# Altium PCB CanGateLPC1768_rev1.PcbDoc
Units mm, origin at the board's own origin, x right, y up, seen from the top; angles counter-clockwise.
Board outline 99 x 36 mm, 2 copper layers (Top Layer, Bottom Layer), stack 1.571 mm thick; 48 components, 33 nets, 221 pads, 81 vias.
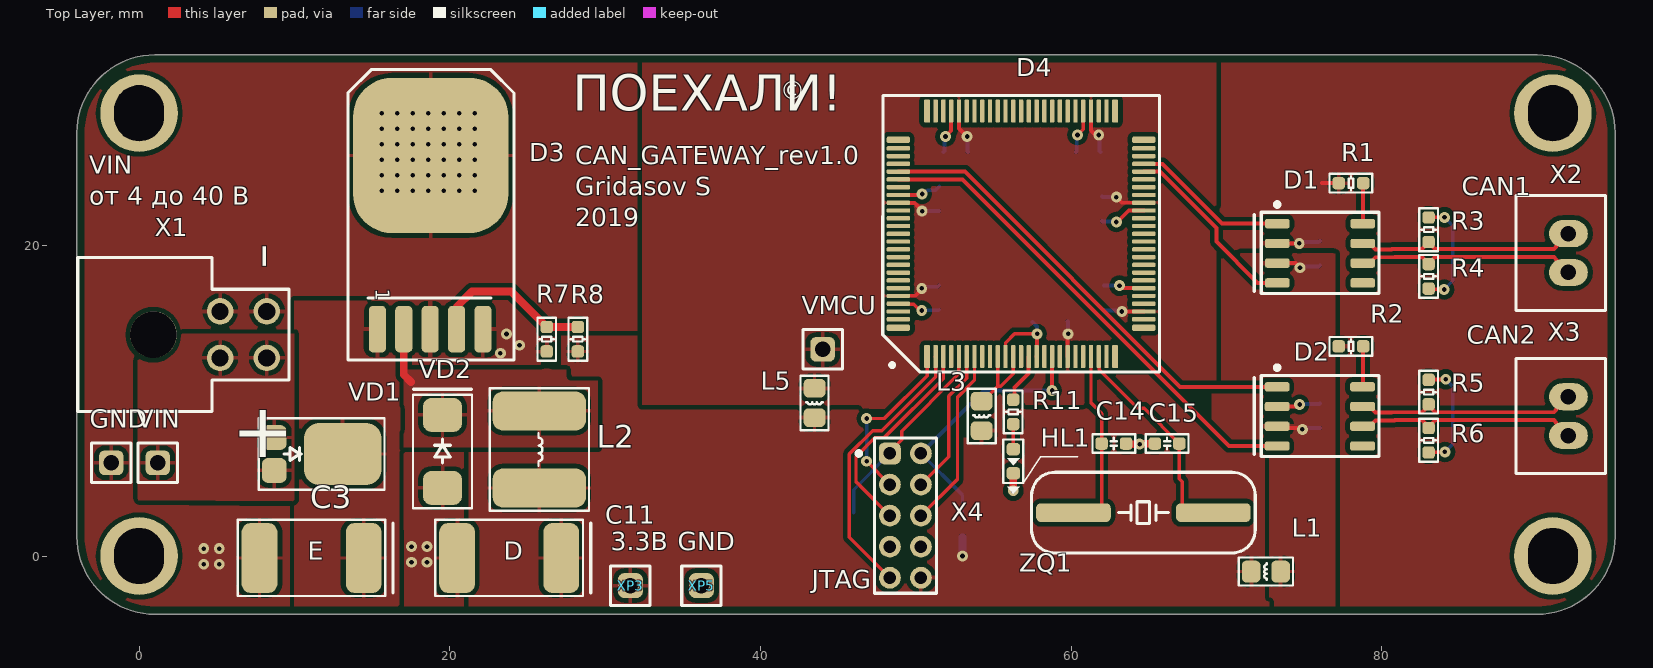
[diagram p0: Top Layer view]
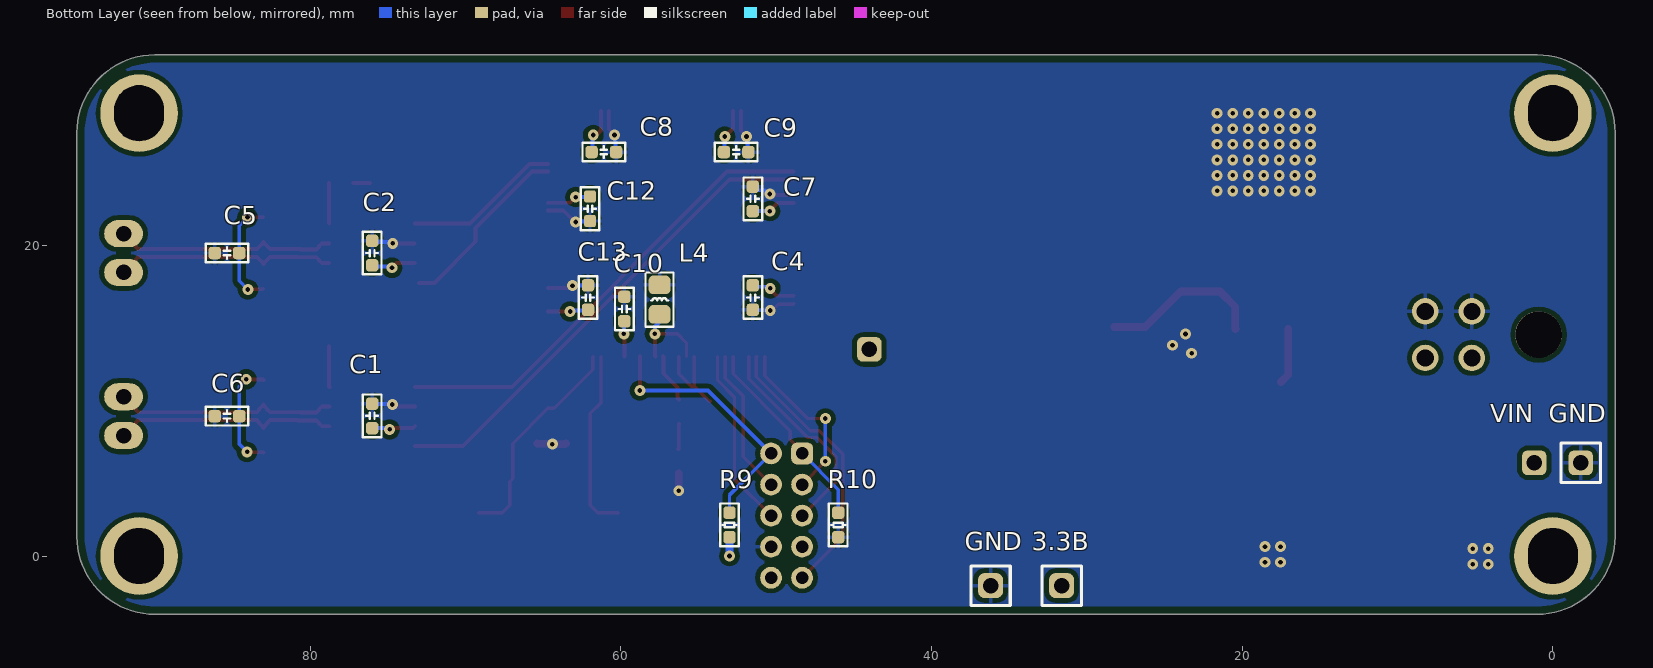
[diagram p1: Bottom Layer view, seen from below]

## Layer stack, top to bottom
Top Solder: solder mask 0.0102, Solder Resist, Dk 3.5
Top Layer: signal copper 0.0356
Dielectric 1: dielectric 1.5, FR-4, Dk 4.8
Bottom Layer: signal copper 0.0356
Bottom Solder: solder mask 0.0102, Solder Resist, Dk 3.5

## Board outline
-4,1.25 -4,27.25 cw(c1,27.25) 1,32.25 90,32.25 cw(c90,27.25) 95,27.25 95,1.25 cw(c90,1.25) 90,-3.75 1,-3.75 cw(c1,1.25)

## Design rules (kind name [scope] priority, off if disabled: settings)
BoardOutlineClearance "Bot Outline" [OnLayer('Bottom Layer')] p1: gap=0.5 ignorepadtopadclearanceinfootprint=FALSE
BoardOutlineClearance "Top Outline" [OnLayer('Top Layer')] p2: gap=0.5 ignorepadtopadclearanceinfootprint=FALSE
Clearance Clearance_1 [All] p1: gap=0.22 ignorepadtopadclearanceinfootprint=FALSE except(0: Arc-Hole Track-Hole SMDPad-Hole THPad-Hole Via-Hole Fill-Hole Poly-Hole Region-Hole Text-Hole; 0.2: SMDPad-SMDPad; 0.3: Arc-Poly Arc-Region Track-Poly Track-Region SMDPad-Poly SMDPad-Region THPad-Poly THPad-Region Via-Poly Via-Region Fill-Poly Fill-Region Poly-Poly Poly-Region Region-Region; 0.4: SMDPad-Via THPad-Via Via-Via; 0.5: Region-Text)
DiffPairsRouting [All] p1: maxlimit=0.254 minlimit=0.25 mostfreqgap=0.25 toplayer_minwidth=0.25 toplayer_maxwidth=0.381 toplayer_prefwidth=0.25 bottomlayer_minwidth=0.25 bottomlayer_maxwidth=0.381 bottomlayer_prefwidth=0.25 maxuncoupledlength=12.7
HoleSize PAD1 [IsPad] p1: absolutevalues=TRUE maxlimit=8 minlimit=0.6 maxpercent=80.000 minpercent=20.000
HoleSize VIA1 [IsVia] p2: absolutevalues=TRUE maxlimit=0.5 minlimit=0.3 maxpercent=80.000 minpercent=20.000
HoleToHoleClearance [All] p1: gap=0.4 allowstackedmicrovias=TRUE
MinimumSolderMaskSliver [All] p1 off: minsoldermaskwidth=0.22
NetAntennae [All] p1 off: netantennaetolerance=0
PolygonConnect [IsVia] p1: connectstyle=Direct reliefconductorwidth=0.254 reliefentries=4 polygonreliefangle="90 Angle" airgapwidth=0.254
PolygonConnect Direct [All vs IsNamedPolygon('DIR')] p2: connectstyle=Direct reliefconductorwidth=0.254 reliefentries=4 polygonreliefangle="90 Angle" airgapwidth=0.254
PolygonConnect Simple [All] p3: connectstyle=Relief reliefconductorwidth=0.25 reliefentries=4 polygonreliefangle="90 Angle" airgapwidth=0.3
RoutingVias Via [All] p1: holewidth=0.3 width=0.7 viastyle="Through Hole" minholewidth=0.3 minwidth=0.7 maxholewidth=0.5 maxwidth=1
SilkToSilkClearance [All] p1 off: silktosilkclearance=0.254
SilkToSolderMaskClearance [IsPad] p1 off: minsilkscreentomaskgap=0.254 clearancetoexposedcopper=TRUE
SolderMaskExpansion [All] p1: expansion=0.102
Width [All] p1: maxlimit=0.5 minlimit=0.22 preferedwidth=0.25 minimp=50.000000 maximp=50.000000 favimp=50.000000
23 further rules are at their usual default settings.

## Classes and differential pairs
component class CanGateLPC1768_rev1: C1 C2 C4 C5 C6 C7 C8 C9 C10 C11 C12 C13 C14 C15 D3 D4 GND HL1 L1 L2 L3 L4 L5 R5 R6 R7 R8 R9 R10 R11 VD2 X2 X3 XP5 ZQ1
differential pair CAN2: +CAN2_P -CAN2_N
differential pair CAN1: +CAN1_P -CAN1_N

## Components (designator, comment, footprint, x,y, rotation, side; value= is the part's Value field where it differs from the comment)
C1 "0.1u" "C 0603" 76,9.017 r90 bottom locked
C2 "0.1u" "C 0603" 76,19.5 r90 bottom locked
C3 "47u 35V" "C E-CASE" 11.1,-0.127 r180 top
C4 "0.1u" "C 0603" 51.5,16.637 r270 bottom
C5 "0.047u" "C 0603" 85.344,19.5 r0 bottom
C6 "0.047u" "C 0603" 85.344,9 r0 bottom
C7 "0.1u" "C 0603" 51.5,22.987 r90 bottom
C8 "0.1u" "C 0603" 61.087,26 r180 bottom
C9 "0.1u" "C 0603" 52.57,26 r180 bottom
C10 "0.1u" "C 0603" 59.769,15.9 r90 bottom
C11 "220u 10V" "C D-CASE" 23.82,-0.127 r180 top
C12 "0.1u" "C 0603" 61.976,22.352 r270 bottom
C13 "0.1u" "C 0603" 62.103,16.637 r90 bottom
C14 "12p" "C 0603" 62.738,7.239 r180 top
C15 "12p" "C 0603" 66.167,7.239 r180 top
D1 "MAX3051ESA" SO-8#1 76,19.5 r0 top locked
D2 "MAX3051ESA" SO-8#2 76,9 r0 top locked
D3 "LM2575S-ADJ" DPAK-5 15.335,14.605 r270 top
D4 "LPC1769FBD100" LQFP100 56.769,20.739 r90 top
GND "GND" "Test Pin" -1.794,6 r0 top (schematic designator XP4)
HL1 "KPT1608" "HL 1608" 56.269,6.096 r270 top
L1 "BLM21PG221SN1D" "L 0805" 72.525,-1 r0 top
L2 "SRN6045-680M" "L SRN6045" 25.76,6.858 r270 top
L3 "BLM21PG221SN1D" "L 0805" 54.229,9.017 r90 top
L4 "BLM21PG221SN1D" "L 0805" 57.5,16.5 r270 bottom
L5 "BLM21PG221SN1D" "L 0805" 43.475,9.854 r90 top
R1 "0" "R 0603" 78,24 r0 top
R2 "0" "R 0603" 78,13.5 r0 top
R3 "60.4" "R 0603" 83,21 r90 top locked
R4 "60.4" "R 0603" 83,18 r90 top locked
R5 "60.4" "R 0603" 83,10.55 r90 top locked
R6 "60.4" "R 0603" 83,7.45 r90 top locked
R7 "5.9K" "R 0603" 26.238,13.953 r90 top
R8 "10K" "R 0603" 28.238,13.953 r270 top
R9 "10K" "R 0603" 53,2 r90 bottom
R10 "10K" "R 0603" 46,2 r90 bottom
R11 "220" "R 0603" 56.261,9.275 r90 top
VD1 "PMEG050V150EPD" "VD SOT1289" 10.2,6.568 r270 top
VD2 "STPS340U" "VD SMB" 19.53,6.731 r90 top (schematic designator VD1)
VIN "12V" "Test Pin" 1.201,6 r0 top (schematic designator XP2)
VMCU "VMCU" "Test Pin" 44,13.304 r0 top (schematic designator XP1)
X1 "43045-0400" MICRO-FIT-4 6.717,14.25 r270 top locked
X2 "PLS-2" "JST XH B2B-XH-A" 92,19.5 r270 top locked
X3 "PLS-2" "JST XH B2B-XH-A" 92,9 r270 top locked
X4 "ISU_JTAG" PLD2-10 49.325,2.6 r0 top
XP3 "3.3V" "Test Pin" 31.623,-1.905 r0 top
XP5 "GND" "Test Pin" 36.195,-1.905 r0 top
ZQ1 "12 MHz" "ZQ HC-49SMD" 64.643,2.794 r180 top

## Footprints (in the part's own frame and the unit in brackets; to place one, negate y for a bottom-side part, rotate by r counter-clockwise, add the part's x,y. Pads: shape width x height; smd on the part's side, far side on the other; paste and mask are expansions set on the pad)
"C 0603" [mm]
  rrect50% 0.8x0.8 smd: 1(-0.787,0) 2(0.787,0)
  silkscreen extent -1.38,-0.6 1.38,0.6, body extent -0.8,-0.4 0.8,0.4, height 0.51
"C D-CASE" [mm]
  rrect50% 2.3x4.5 smd: 1(-3.352,0) 2(3.352,0)
  silkscreen extent -5.25,-2.45 4.75,2.45, body extent -3.7,-2.15 3.7,2.15, height 2.81
"C E-CASE" [mm]
  rrect50% 2.3x4.5 smd: 1(-3.352,0) 2(3.352,0)
  silkscreen extent -5.25,-2.45 4.75,2.45, body extent -3.7,-2.15 3.7,2.15, height 4.01
DPAK-5 [mm]
  rrect50% 3x1.1 smd: 1(0,0) 2(0,1.7) 3(0,3.4) 4(0,5.1) 5(0,6.8)
  rrect50% 10x10 smd: 3(-11.176,3.429)
  silkscreen extent -16.7,-1.9 2,8.8, body extent -14.11,-1.57 0.79,8.43, height 4.6
"HL 1608" [mm]
  rrect50% 0.8x0.85 smd: 1(-0.78,0) 2(0.77,0)
  silkscreen extent -1.4,-0.65 2.07,0.65, body extent -0.8,-0.4 0.8,0.4, height 0.75
"JST XH B2B-XH-A" [mm]
  oval 1.75x2.5 hole 1: 1(-1.25,0) 2(1.25,0)
  silkscreen extent -3.7,-3.38 3.7,2.38, body extent -3.7,-3.38 3.7,2.38, height 7
"L 0805" [mm]
  rrect50% 1.2x1.4 smd: 1(-0.95,0) 2(0.95,0)
  silkscreen extent -1.75,-0.9 1.75,0.9, body extent -1,-0.63 1,0.63, height 0.9
"L SRN6045" [mm]
  rrect50% 2.5x6 smd: 1(-2.479,0) 2(2.479,0)
  silkscreen extent -3.95,-3.2 3.95,3.2, body extent -3,-3 3,3, height 4.5
LQFP100 [mm]
  rrect50% 1.5x0.4 smd: 1(-7.9,6.05) 25(-7.9,-6.05) 51(7.9,-6.05) 75(7.9,6.05)
  rrect50% 1.5x0.28 smd: 2(-7.9,5.5) 3(-7.9,5) 4(-7.9,4.5) 5(-7.9,4) 6(-7.9,3.5) 7(-7.9,3) 8(-7.9,2.5) 9(-7.9,2) 10(-7.9,1.5) 11(-7.9,1) 12(-7.9,0.5) 13(-7.9,0) 14(-7.9,-0.5) 15(-7.9,-1) 16(-7.9,-1.5) 17(-7.9,-2) 18(-7.9,-2.5) 19(-7.9,-3) 20(-7.9,-3.5) 21(-7.9,-4) 22(-7.9,-4.5) 23(-7.9,-5) 24(-7.9,-5.5) 52(7.9,-5.5) 53(7.9,-5) 54(7.9,-4.5) 55(7.9,-4) 56(7.9,-3.5) 57(7.9,-3) 58(7.9,-2.5) 59(7.9,-2) 60(7.9,-1.5) 61(7.9,-1) 62(7.9,-0.5) 63(7.9,0) 64(7.9,0.5) 65(7.9,1) 66(7.9,1.5) 67(7.9,2) 68(7.9,2.5) 69(7.9,3) 70(7.9,3.5) 71(7.9,4) 72(7.9,4.5) 73(7.9,5) 74(7.9,5.5)
  rrect50% 0.4x1.5 smd: 26(-6.05,-7.9) 50(6.05,-7.9) 76(6.05,7.9) 100(-6.05,7.9)
  rrect50% 0.28x1.5 smd: 27(-5.5,-7.9) 28(-5,-7.9) 29(-4.5,-7.9) 30(-4,-7.9) 31(-3.5,-7.9) 32(-3,-7.9) 33(-2.5,-7.9) 34(-2,-7.9) 35(-1.5,-7.9) 36(-1,-7.9) 37(-0.5,-7.9) 38(0,-7.9) 39(0.5,-7.9) 40(1,-7.9) 41(1.5,-7.9) 42(2,-7.9) 43(2.5,-7.9) 44(3,-7.9) 45(3.5,-7.9) 46(4,-7.9) 47(4.5,-7.9) 48(5,-7.9) 49(5.5,-7.9) 77(5.5,7.9) 78(5,7.9) 79(4.5,7.9) 80(4,7.9) 81(3.5,7.9) 82(3,7.9) 83(2.5,7.9) 84(2,7.9) 85(1.5,7.9) 86(1,7.9) 87(0.5,7.9) 88(0,7.9) 89(-0.5,7.9) 90(-1,7.9) 91(-1.5,7.9) 92(-2,7.9) 93(-2.5,7.9) 94(-3,7.9) 95(-3.5,7.9) 96(-4,7.9) 97(-4.5,7.9) 98(-5,7.9) 99(-5.5,7.9)
  silkscreen extent -8.9,-8.9 8.9,8.9, body extent -7.37,-7.97 8.62,8.03, height 1.35
MICRO-FIT-4 [mm]
  round 1.7 hole 1.1: 1(1.5,-1.5) 2(-1.5,-1.5) 3(1.5,1.5) 4(-1.5,1.5)
  round 3 hole 3 unplated: 5(0,-5.8)
  silkscreen extent -4.95,-10.67 4.95,2.92, body extent -4.83,-10.37 4.82,1.87, height 8.77
PLD2-10 [mm]
  rrect50% 1.4x1.4 hole 0.8: 1(-1,4)
  round 1.4 hole 0.8: 2(1,4) 3(-1,2) 4(1,2) 5(-1,0) 6(1,0) 7(-1,-2) 8(1,-2) 9(-1,-4) 10(1,-4)
  silkscreen extent -3.13,-5 2,5, body extent -2,-5 2,5, height 6
"R 0603" [mm]
  rrect50% 0.8x0.8 smd: 1(-0.787,0) 2(0.787,0)
  silkscreen extent -1.38,-0.6 1.38,0.6, body extent -0.8,-0.4 0.8,0.41, height 0.46
SO-8#1 [mm]
  rrect50% 1.6x0.6 smd: 1(-2.74,1.89) 2(-2.74,0.62) 3(-2.74,-0.65) 4(-2.74,-1.92) 5(2.76,-1.92) 6(2.76,-0.65) 7(2.76,0.62) 8(2.76,1.89)
  silkscreen extent -4.22,-2.6 3.8,3.25, body extent -3.1,-2.5 3.1,2.5, height 1.5
SO-8#2 [mm]
  rrect50% 1.6x0.6 smd: 1(-2.75,1.89) 2(-2.75,0.62) 3(-2.75,-0.65) 4(-2.75,-1.92) 5(2.75,-1.92) 6(2.75,-0.65) 7(2.75,0.62) 8(2.75,1.89)
  silkscreen extent -4.22,-2.6 3.8,3.25, body extent -3.1,-2.5 3.1,2.5, height 1.5
"Test Pin" [mm]
  rrect50% 1.6x1.6 hole 1: 1(0,0)
  silkscreen extent -1.27,-1.27 1.27,1.27, body extent -0.8,-0.8 0.8,0.8
"VD SMB" [mm]
  rrect50% 2.2x2.5 smd: 1(-2.35,0) 2(2.35,0)
  silkscreen extent -3.65,-1.9 4,1.9, body extent -2.7,-1.8 2.7,1.8, height 2.31
"VD SOT1289" [mm]
  rrect50% 1.6x1.6 smd: 1(-1.06,-1.5) 1(1.06,-1.5)
  rrect50% 4x5 smd: 2(0,2.9)
  silkscreen extent -2.3,-2.5 2.3,5.6, body extent -2.2,-1.82 2.2,4.78, height 0.8
"ZQ HC-49SMD" [mm]
  rrect50% 4.8x1.2 smd: 1(-4.5,0) 2(4.5,0)
  silkscreen extent -7.2,-2.6 7.2,2.6, body extent -6.75,-2.5 6.75,2.5, height 4.3

## Part data
C1 C2 C4 C5 C6 C7 C8 C9 C10 C12 C13 C14 C15: library part "C 0603", "Чип конденсатор керамический", ComponentLink1Description=Datasheet, ComponentLink1URL=http://www.smd.ru/katalog/kondensatory/keramicheskie/, R1=0603, R2=50V
  C1 C2 C4 C7 C8 C9 C10 C12 C13: Remark=C.801
  C5 C6: Remark=C.806
  C14 C15: Remark=C.608
C3: library part "C E-CASE", "Чип конденсатор танталовый", ComponentLink1Description=Datasheet, ComponentLink1URL=http://www.smd.ru/katalog/kondensatory/polyarnye/tantalovye/, R1='E'
C11: library part "C D-CASE", "Чип конденсатор танталовый", ComponentLink1Description=Datasheet, ComponentLink1URL=http://www.smd.ru/katalog/kondensatory/polyarnye/tantalovye/, R1='D'
D1 D2: library part "CAN MAX3051", "CAN трансивер", ComponentLink1Description=Datasheet, ComponentLink1URL=http://www.farnell.com/datasheets/663306.pdf, Remark=D.30
D3: library part "DCDC LM2576S", "DC/DC преобразователь", ComponentLink1Description=Datasheet, ComponentLink1URL=http://www.ti.com/lit/ds/symlink/lm2576.pdf
D4: "Микроконтроллер", Analog="Аналог: LPC1768FBD100", ComponentLink1Description=Datasheet, ComponentLink1URL=http://www.nxp.com/documents/user_manual/UM10360.pdf?fasp=1&WT_TYPE=Users%20Guides&WT_VENDOR=FREESCALE&WT_FILE_FORMAT=pdf&WT_ASSET=Documentation&fileExt=.pdf, Remark=D.9
GND VIN VMCU XP3 XP5: library part "Test Pin", "Тестовый контакт"
HL1: library part "HL KPT1608", "Чип светодиод", ComponentLink1Description=Datasheet, ComponentLink1URL=http://datasheet.seekic.com/PdfFile/KPT/KPT1608_KPT1608EC_KPT1608HC_KPT1608H.pdf, Remark=HL.1
L1 L3 L4 L5: library part "L 0805", "Чип индуктивность", ComponentLink1Description=Datasheet, R1=0805
L2: library part "L SRN6045", "Индуктивность", ComponentLink1Description=Datasheet, ComponentLink1URL=http://www.bourns.com/data/global/pdfs/SRN6045.pdf
R1 R2 R3 R4 R5 R6 R7 R8 R9 R10 R11: library part "R 0603", "Чип резистор", ComponentLink1Description=Datasheet, ComponentLink1URL=http://www.smd.ru/katalog/rezistory_i_potenciometry/, R1=0603, R2=±1%
  R1 R2 R9 R10: Remark=R.803
  R3 R4 R5 R6: Remark=R.716
  R11: Remark=R.713
VD1: library part "VD SOT1289", "Диод Шоттки", ComponentLink1Description=Datasheet, ComponentLink1URL=http://www.farnell.com/datasheets/1965377.pdf, R1=SOT1289, Remark=VD.6
VD2: library part "VD SMB", "Диод Шоттки", ComponentLink1Description=Datasheet, ComponentLink1URL=http://www.st.com/content/ccc/resource/technical/document/datasheet/bb/db/21/0c/04/d9/41/a5/CD00000844.pdf/files/CD00000844.pdf/jcr:content/translations/en.CD00000844.pdf, R1=SMB
X1: library part MICRO-FIT-4, "Разъем MicroFit", ComponentLink1Description=Description, ComponentLink1URL=http://www.mt-system.ru/sites/default/files/docs/documents/43045-0x00_sd.pdf, R1=3.0, Remark=X.64
X2 X3 X4: "Вилка штыревая", ComponentLink1URL=http://www.platan.ru/pdf/ec278.pdf
  X2 X3: ComponentLink1Description=Datasheet, R1=2.54
  X4: ComponentLink1Description=Description, R1=2.0, Remark=X.37
ZQ1: library part "ZQ HC-49SMD", "Кварцевый резонатор", ComponentLink1Description=Datasheet, ComponentLink1URL=http://www.platan.ru/pdf/datasheets/quartz/HC-49SMD.pdf, R1="0532 MJ"

## Free pads (board coordinates)
  round 5 hole 3.2 slot 3.6 at 90 deg: 0(0,0) 0(0,28.5) 0(91,0) 0(91,28.5)

## Via types
v1: diameter 0.7, hole 0.3, Top Layer to Bottom Layer, tented both sides, 81 vias

## Nets (pads, with @x,y where several pads share a name; then routed paths per layer and width w, separated by ;. In a path a pad name is that pad's centre, name@x,y a point inside that pad or via, vN(x,y) a via of type N, cw(c..) or ccw(c..) an arc to the next point about the centre after c; other vN are vias at no path point)
3.3V: C11.1 L1.1 L2.2 L3.1 L5.1 R8.2 R9.1 X4.10 XP3.1 | length 1.2
  Bottom Layer w0.5: v1(53,0) R9.1
12V: VD1.1 VIN.1 X1.1 X1.3
#RSTOUT: D4.14 R11.2 | length 3.2
  Top Layer w0.25: R11.2 56.338,10.14 56.338,10.838 57.254,11.754 57.254,12.824 D4.14
CAN1_N: D1.6 R4.2 X2.2 | length 14.3
  Top Layer w0.25: D1.6 79.246,18.85 79.42,19.023 79.42,19.071 79.581,19.233 80.829,19.233 80.844,19.248 82.579,19.248 R4.2@83,18.827 ; R4.2 R4.2@83,18.827 ; X2.2 92,18.281 91.209,19.072 91.209,19.102 91.062,19.248 87.543,19.248 83.421,19.248 R4.2@83,18.827
CAN1_P: D1.7 R3.1 X2.1 | length 14.3
  Top Layer w0.25: D1.7 79.246,20.12 79.42,19.947 79.42,19.899 79.581,19.737 80.62,19.737 80.636,19.752 82.579,19.752 R3.1@83,20.173 ; R3.1 R3.1@83,20.173 ; X2.1 92,20.719 91.209,19.928 91.209,19.898 91.062,19.752 87.752,19.752 83.421,19.752 R3.1@83,20.173
CAN1_RX: D1.4 D4.46 | length 11.8
  Top Layer w0.25: D4.46 65.7,24.739 69.339,21.1 69.339,20.236 71.995,17.58 D1.4@73,17.58
CAN1_T: C5.1 R3.2 R4.1 | length 7.2
  Top Layer w0.22: R4.1 83.031,17.181 83.969,17.181 v1(84,17.15) ; R3.2 83.006,21.794 84.019,21.794 v1(84.025,21.8)
  Bottom Layer w0.22: v1(84,17.15) 84.557,17.707 C5.1 84.557,21.268 v1(84.025,21.8)
CAN1_TX: D1.1 D4.47 | length 10.2
  Top Layer w0.25: D4.47 65.865,25.239 69.714,21.39 D1.1
CAN2_N: D2.6 R6.2 X3.2 | length 14.4
  Top Layer w0.25: D2.6 79.236,8.35 79.41,8.523 79.41,8.571 79.571,8.733 80.824,8.733 80.839,8.748 82.579,8.748 82.725,8.602 82.725,8.553 R6.2@83,8.278 ; R6.2 R6.2@83,8.278 ; X3.2 92,7.781 91.209,8.572 91.209,8.602 91.062,8.748 83.421,8.748 83.275,8.602 83.275,8.553 R6.2@83,8.278
CAN2_P: D2.7 R5.1 X3.1 | length 14.4
  Top Layer w0.25: D2.7 79.236,9.62 79.41,9.447 79.41,9.399 79.571,9.237 80.616,9.237 80.631,9.252 82.579,9.252 82.725,9.398 82.725,9.447 R5.1@83,9.722 ; R5.1 R5.1@83,9.722 ; X3.1 92,10.219 91.209,9.428 91.209,9.398 91.062,9.252 83.421,9.252 83.275,9.398 83.275,9.447 R5.1@83,9.722
CAN2_RX: D2.4 D4.81 | length 31.5
  Top Layer w0.25: D4.81 52.996,24.239 70.155,7.08 D2.4
CAN2_T: C6.1 R5.2 R6.1 | length 7.3
  Top Layer w0.25: R6.1 83.019,6.681 84.031,6.681 v1(84.05,6.7) ; R5.2 83.019,11.356 84.081,11.356 v1(84.1,11.375)
  Bottom Layer w0.25: v1(84.05,6.7) 84.557,7.207 C6.1 84.557,10.918 v1(84.1,11.375) v1@84.05,11.325
CAN2_TX: D2.1 D4.80 | length 30.1
  Top Layer w0.25: D4.80 53.161,24.739 67.01,10.89 D2.1
CAN_VCC: C1.1 C2.1 D1.3 D2.3 L1.2 | length 5.8
  Top Layer w0.25: D2.3 73.364,8.236 74.789,8.236 v1(74.875,8.15) ; D1.3 74.45,18.85 74.725,18.575 v1(74.725,18.55)
  Bottom Layer w0.25: v1(74.725,18.55) 74.806,18.631 75.919,18.631 C2.1 ; v1(74.875,8.15) 74.955,8.23 C1.1
CRS1: D1.8 R1.2 | length 2.6
  Top Layer w0.25: D1.8 78.787,21.417 R1.2
CRS2: D2.8 R2.2 | length 2.6
  Top Layer w0.25: D2.8 78.787,10.927 R2.2
FB: D3.4 R7.2 R8.1 | length 10.6
  Top Layer w0.5: D3.4 20.452,14.622 20.452,16.05 21.426,17.025 23.954,17.025 R7.2 R8.1
G_ADC: D4.11 D4.15 L4.2 | length 5.6
  Top Layer w0.22: D4.11 55.769,13.725 56.344,14.3 v1(57.8,14.3) 57.784,14.284 v1@57.708,14.208
  Top Layer w0.25: D4.15 57.784,12.854 v1@57.784,14.284
  Bottom Layer w0.25: L4.2@57.5,15.052 57.787,14.765 57.787,14.312 v1(57.8,14.3)
GND: C1.2 C2.2 C3.2 C4.2 C5.2 C6.2 C7.2 C8.2 C9.2 C10.2 C11.2 C12.2 C13.2 C14.1 C15.2 D1.2 D2.2 D3.3 D3.5 D4.31 D4.41 D4.55 D4.72 D4.83 D4.97 GND.1 HL1.2 L4.1 R1.1 R2.1 R7.1 R10.1 VD2.1 X1.2 X1.4 X4.8 XP5.1 | length 26.7
  Top Layer w0.22: D4.97 48.899,16.209 49.866,16.209 50.274,15.801 v1(50.377,15.801)
  Top Layer w0.25: D4.83 50.339,23.239 v1(50.4,23.3) ; v1(51.9,27) 52.269,27.369 D4.72 ; v1(60.4,27.1) 60.769,27.469 D4.55 ; v1(62.9,21.5) 62.961,21.5 63.7,22.239 D4.41 ; v1(63.1,17.4) 63.261,17.239 D4.31 ; D2.2 74.57,9.62 v1(74.7,9.75) ; D1.2 74.67,20.12 v1(74.675,20.125) ; 76.15,24 R1.1
  Top Layer w0.5: v1(56.269,4.2) HL1.2 ; C14.1 63.564,7.2 v1(64.4,7.2) 64.42,7.22 65.36,7.22 C15.2
  Bottom Layer w0.22: v1(50.377,15.801) 50.402,15.825 51.476,15.825 C4.2
  Bottom Layer w0.25: v1(50.4,23.3) 50.522,23.3 50.768,23.546 51.271,23.546 C7.2 ; C9.2 51.841,26.059 51.841,26.941 v1(51.9,27) ; C8.2 60.35,26.05 60.35,27.05 v1(60.4,27.1) ; C12.2 62.008,21.532 62.868,21.532 v1(62.9,21.5) ; C13.2 62.115,17.412 63.088,17.412 v1(63.1,17.4) ; v1(74.675,20.125) 74.756,20.206 75.919,20.206 C2.2 ; v1(74.7,9.75) 74.727,9.777 75.973,9.777 C1.2
  other v1: 4.157,-0.527 5.157,-0.527 17.536,-0.4 18.536,-0.4 4.157,0.473 5.157,0.473 17.536,0.6 18.536,0.6 23.25,13.05 24.483,13.566 23.652,14.289 15.61,23.5 16.61,23.5 17.61,23.5 18.61,23.5 19.61,23.5 20.61,23.5 21.61,23.5 15.61,24.5 16.61,24.5 17.61,24.5 18.61,24.5 19.61,24.5 20.61,24.5 21.61,24.5 15.61,25.5 16.61,25.5 17.61,25.5 18.61,25.5 19.61,25.5 20.61,25.5 21.61,25.5 15.61,26.5 16.61,26.5 17.61,26.5 18.61,26.5 19.61,26.5 20.61,26.5 21.61,26.5 15.61,27.5 16.61,27.5 17.61,27.5 18.61,27.5 19.61,27.5 20.61,27.5 21.61,27.5 15.61,28.5 16.61,28.5 17.61,28.5 18.61,28.5 19.61,28.5 20.61,28.5 21.61,28.5
NetC14_2: C14.2 D4.22 ZQ1.2 | length 11.9
  Top Layer w0.22: ZQ1.2 61.475,2.794 61.951,3.27 C14.2 61.951,9.174 61.269,9.856 D4.22
NetC15_1: C15.1 D4.23 ZQ1.1 | length 14.2
  Top Layer w0.22: D4.23 61.799,12.809 61.799,11.993 64.292,9.5 64.694,9.5 C15.1 66.954,4.983 67.153,4.784 67.153,3.27 67.629,2.794 ZQ1.1
NetHL1_1: HL1.1 R11.1 | length 1.6
  Top Layer w0.25: R11.1 56.265,8.484 56.265,6.88 HL1.1
nRES: D4.17 R9.2 X4.2 | length 17.2
  Top Layer w0.25: v1(58.769,10.65) D4.17
  Bottom Layer w0.22: X4.2 53,3.925 R9.2
  Bottom Layer w0.25: X4.2 54.375,10.65 v1(58.769,10.65)
OUT: D3.2 L2.1 VD2.2 | length 3.6
  Top Layer w0.5: D3.2 17.035,11.665 17.5,11.2
SWCLK: D4.5 R10.2 X4.1 | length 12.9
  Top Layer w0.22: X4.1 48.325,6.73 49.075,7.48 49.075,8.025 52.769,11.719 D4.5
  Bottom Layer w0.22: R10.2 46,4.275 X4.1
SWDIO: D4.3 X4.5 | length 13.8
  Top Layer w0.22: X4.5 46.145,4.78 46.145,6.382 47.393,7.63 47.98,7.63 51.769,11.419 D4.3
SWO: D4.1 X4.3 | length 11.2
  Top Layer w0.22: v1@46.8,6.1 v1(46.825,6.1) X4.3 ; v1(46.825,8.85) 47.955,8.85 50.719,11.614 D4.1
  Bottom Layer w0.22: v1(46.825,6.1) v1(46.825,8.85)
TDI: D4.2 X4.9 | length 18
  Top Layer w0.22: X4.9 45.705,1.22 45.705,6.564 47.211,8.07 47.798,8.07 51.269,11.541 D4.2 D4.2@51.249,12.819
UART3_RXD: D4.6 X4.4 | length 9.5
  Top Layer w0.22: X4.4 52.125,6.4 52.125,10.3 53.269,11.444 D4.6
UART3_TXD: D4.7 X4.6 | length 11.7
  Top Layer w0.22: X4.6 52.675,4.95 52.675,10.228 53.769,11.322 D4.7
V_ADC: D4.10 D4.12 L3.2 | length 5.8
  Top Layer w0.22: L3.2 54.317,9.967 55.269,10.919 ; D4.10 55.269,10.919 ; D4.12 56.265,12.835 56.269,12.831 56.269,11.718 55.47,10.919 55.269,10.919
VIN: C3.1 D3.1 VD1.2
VMCU: C4.1 C7.1 C8.1 C9.1 C10.1 C12.1 C13.1 D4.19 D4.28 D4.42 D4.54 D4.71 D4.84 D4.96 L5.2 VMCU.1 | length 19.6
  Top Layer w0.22: D4.96@48.899,16.769 D4.96 48.883,16.725 48.908,16.75 49.975,16.75 50.377,17.152 v1(50.377,17.226) v1@50.351,17.226
  Top Layer w0.25: D4.84 48.884,22.724 49.915,22.724 50.4,22.239 v1(50.4,22.2) ; D4.71 52.784,28.624 52.784,27.516 v1(53.3,27) ; D4.19 59.769,14.269 v1(59.8,14.3) ; D4.54 61.269,27.4 61.569,27.1 v1(61.769,27.1) ; v1(62.9,23.1) 63.261,22.739 D4.42@64.669,22.739 ; v1(63.259,15.739) D4.28@64.669,15.739
  Bottom Layer w0.22: v1(50.377,17.226) 50.469,17.318 51.393,17.318 C4.1
  Bottom Layer w0.25: v1(50.4,22.2) C7.1 ; v1(53.3,27) 53.329,26.971 53.329,26.029 C9.1 ; C10.1 59.784,15.097 59.784,14.315 v1(59.8,14.3) ; v1(61.769,27.1) 61.822,27.047 61.822,26.053 C8.1 ; C12.1 61.996,23.12 62.88,23.12 v1(62.9,23.1) ; C13.1 62.158,15.794 63.204,15.794 v1(63.259,15.739)
pads on no net: D1.5 D2.5 D4.4 D4.8 D4.9 D4.13 D4.16 D4.18 D4.20 D4.21 D4.24 D4.25 D4.26 D4.27 D4.29 D4.30 D4.32 D4.33 D4.34 D4.35 D4.36 D4.37 D4.38 D4.39 D4.40 D4.43 D4.44 D4.45 D4.48 D4.49 D4.50 D4.51 D4.52 D4.53 D4.56 D4.57 D4.58 D4.59 D4.60 D4.61 D4.62 D4.63 D4.64 D4.65 D4.66 D4.67 D4.68 D4.69 D4.70 D4.73 D4.74 D4.75 D4.76 D4.77 D4.78 D4.79 D4.82 D4.85 D4.86 D4.87 D4.88 D4.89 D4.90 D4.91 D4.92 D4.93 D4.94 D4.95 D4.98 D4.99 D4.100 X1.5 X4.7

## Polygon pours and split planes (outlines as drawn)
3.3V on Top Layer "Top Layer-3.3V" (solid, remove dead copper, pour order 40): 21.212,-5 72.75,-5 72.75,-2.65 72.5,-2.4 72.5,11.669 32.07,11.669 32.07,14.181 27.172,14.181 27.172,11.669 21.212,11.669 21.212,8.662
GND on Top Layer "Top Layer-GND" (solid, remove dead copper, pour order 38): 32.206,11.97 32.206,32.5 -4,33 -4,11.97 -3.49,11.97 -3.49,-4 9.883,-4 9.893,-3.989 9.893,3.513 -0.041,3.599 -0.088,3.645 -0.088,11.97
VIN on Top Layer "SIMPLE" (solid, remove dead copper, pour order 30): 10,-3.24 10,16.447 16.934,16.447 17.035,16.346 17.035,-3.24
GND on Top Layer "SIMPLE" (solid, remove dead copper, pour order 28): 17.035,7 22.132,7 22.132,-3.237 22.135,-3.24 17.065,-3.24
12V on Top Layer "SIMPLE" (solid, remove dead copper, pour order 26): -0.2,3.6 -0.088,3.712 -0.088,14.3 10,14.3 10,3.513
no net on Top Layer "SIMPLE" (solid, remove dead copper, pour order 24): 77.5,-7.5
GND on Top Layer "SIMPLE" (solid, remove dead copper, pour order 22): 95,-5 95,32.5 69.2,32.5 69.339,32.361 69.339,19.072 76.951,19.072 77,19.023 77,-5
VMCU on Top Layer "SIMPLE" (solid, remove dead copper, pour order 20): 42.39,9.5 42.352,9.462 32.376,9.462 32.376,32.5 69.339,32.5 69.339,9.353
GND on Top Layer "SIMPLE" (solid, remove dead copper, pour order 18): 25.892,7.106
CAN_VCC on Top Layer "SIMPLE" (solid, remove dead copper, pour order 4): 69.033,19.5 77,19.5 77,-5 69.033,-5
OUT on Top Layer "SIMPLE" (solid, remove dead copper, pour order 2): 29.535,7 17.035,7 17.035,12.058 29.535,12.058
GND on Bottom Layer "SIMPLE" (solid, remove dead copper, pour order 8): -5,32.5 95,32.5 95,-5 -5,-5
GND on Bottom Layer "SIMPLE" (solid, remove dead copper, pour order 10): 0,-12.5
GND on Bottom Layer "SIMPLE" (solid, remove dead copper, pour order 6): 47.875,29.6 47.95,29.675 65.675,29.675 65.675,11.875 65.625,11.825 65.6,11.85 47.85,11.85

## Silkscreen, mask and mechanical layers (free items; w line width, h text height)
Top Overlay:
  lines w0.1: 56.919,4.696 58.043,6.4 60.4,6.4
  text "©" at 41.275,29.02 h2
  text "ПОЕХАЛИ!" at 27.921,27.877 h4
  text "CAN1" at 85.144,22.825 h2
  text "VIN  / от 4 до 40 В" at -3.225,22.225 h2
  text "CAN_GATEWAY_rev1.0 / Gridasov S / 2019" at 28.075,20.825 h2
  text "-" at 5.715,18.415 h6 r270
  text "CAN2" at 85.444,13.275 h2
  text "+" at 5.969,10.541 h6 r180
  text "3.3В" at 30.353,0 h2
  text "GND" at 34.671,0 h2
  text "JTAG" at 43.3,-2.45 h2
Bottom Overlay:
  text "GND" at 0.27,8.225 h2
  text "VIN" at 4.02,8.225 h2
  text "3.3В" at 33.528,0 h2
  text "GND" at 37.846,0 h2
Mechanical 4:
  lines w0.2: -4,1.25 ccw(c1,1.25) 1,-3.75 ; -4,27.25 cw(c1,27.25) 1,32.25 ; 90,-3.75 ccw(c90,1.25) 95,1.25 ; 90,32.25 cw(c90,27.25) 95,27.25

## Text inside footprints (layer, text, board x,y; h text height)
C3: Top Overlay "E" at 10.85,-0.627 h2
C11: Top Overlay "D" at 23.47,-0.627 h2
D3: Top Overlay "1" at 14.935,17.205 h1.52 r270